# Altium PCB 20K Control Board V1.1.PcbDoc (part 10 of 24)
Units mm, origin at the board's own origin, x right, y up, seen from the top; angles counter-clockwise.
Board outline 132 x 260 mm, 4 copper layers (Top Layer, GND, VCC, Bottom Layer); 1384 components, 779 nets, 4515 pads, 1774 vias.
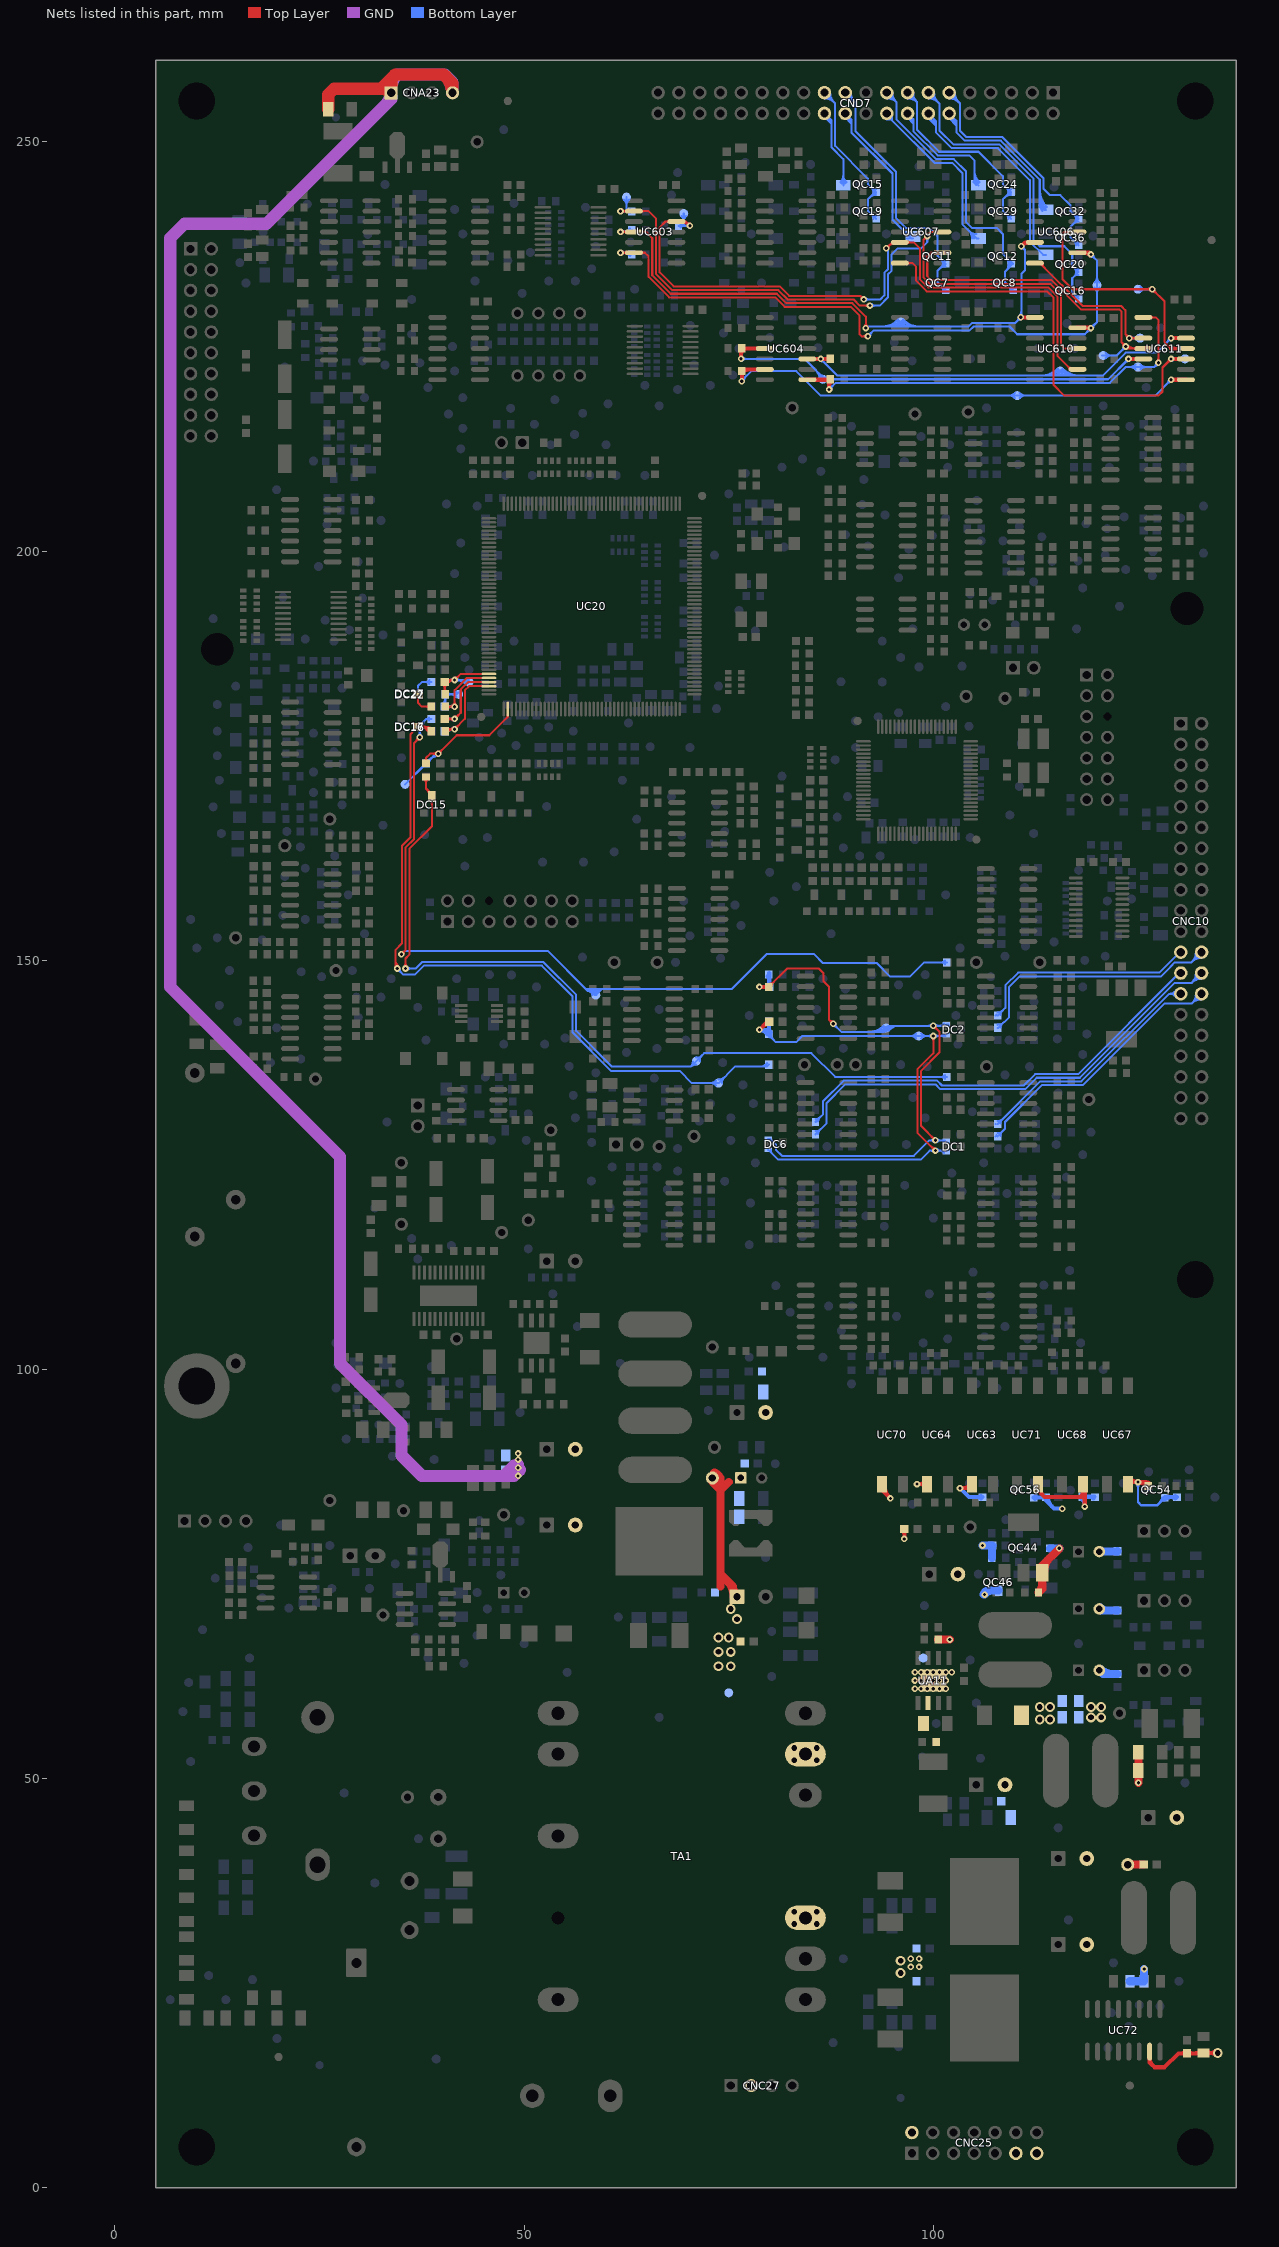
[diagram p12: the nets of this part, all layers, seen from the top]

## Via types
v1: diameter 0.8, hole 0.4, Top Layer to Bottom Layer, tented both sides, 1354 vias
v2: diameter 1.2, hole 0.7, Top Layer to Bottom Layer, 261 vias
v3: diameter 0.8, hole 0.4, Top Layer to Bottom Layer, 58 vias
v4: diameter 1.2, hole 0.7, Top Layer to Bottom Layer, tented top, 58 vias
v5: diameter 0.8, hole 0.4, Top Layer to Bottom Layer, tented top, 22 vias
v6: diameter 1.2, hole 0.7, Top Layer to Bottom Layer, tented both sides, 13 vias
v7: diameter 1.2, hole 0.7, Top Layer to Bottom Layer, tented bottom, 8 vias

## Nets (pads, with @x,y where several pads share a name; then routed paths per layer and width w, separated by ;. In a path a pad name is that pad's centre, name@x,y a point inside that pad or via, vN(x,y) a via of type N, cw(c..) or ccw(c..) an arc to the next point about the centre after c; other vN are vias at no path point) (continued)
GND-DRV: CA3.1 CA4.2 CA7.1 CA71.2 CA72.2 CA73.1 CA76.2 CA81.1 CA82.1 CA84.2 CNA23.1 CNA23.4 GND-DRV.1 LA5.1 LA17.1 pad.ICT@75,60.5 RA112.2 RA119.1 RA120.1 TA1.15 | length 289.2
  Top Layer w1: GND-DRV.1@72.905,86.465 cw(c72.4,84.947) 74,84.947 ; GND-DRV.1@73,86.25 74,85.25 ; GND-DRV.1@73.221,87.414 cw(c72.862,86.334) 74,86.334 ; GND-DRV.1@73.299,86.726 ccw(c74.85,86.601) 73.75,85.5 ; 74,73.5 74,75 ; 74,86.75 74,85.25 ; 74.787,74.213 cw(c72.824,72.25) CA81.1@75.6,72.25 ; 75,86.25 74,85.25 ; 75.125,73.875 cw(c73.891,72.641) CA81.1@75.607,72.323 ; 75.5,73.5 74,75 ; 74,75 74,85.25
  Top Layer w1.5: CA7.1@26.05,254 26.05,255.8 26.75,256.5 33.25,256.5 CNA23.1@33.75,256 33.75,257.75 34.25,258.25 ; 32.422,256.5 cw(c32.422,254.672) CNA23.1@33.715,255.965 ; 32.5,256.5 34.25,258.25 ; CNA23.1@33.796,256.019 cw(c35.708,256.792) 34.25,258.25 ; 40.345,258.064 cw(c38.281,256) CNA23.4@41.2,256 ; CNA23.4@41.25,256 41.25,257.159 40.159,258.25 34.25,258.25
  GND w1.5: 33.134,254.634 ccw(c31.769,256) CNA23.1@33.7,256 ; CNA23.1@33.799,256.009 cw(c36.29,256.46) 34.5,258.25 ; 40.281,258.219 cw(c38.062,256) CNA23.4@41.2,256 ; CNA23.4@41.25,256 41.25,257.25 40.25,258.25 34.5,258.25 ; 47.681,87 ccw(c47.681,89.569) v1@49.497,87.753 ; 48.75,87 47.5,87 ; 48.75,88.25 47.5,87 ; 34.5,258.25 33.75,257.5 33.75,255.25 18.5,240 8.5,240 6.75,238.25 6.75,146.75 27.5,126 27.5,100.75 35,93.25 35,89.5 37.5,87 47.5,87 ; 48.567,88.067 cw(c49.25,87.384) 49.25,88.35 ccw(c49.25,87.384) 48.567,88.067
  other v1: 49.25,87 49.25,88 49.25,89 49.25,89.75
  other v2: 83,52.25 85.75,52.25 83,53.75 85.75,53.75
  other v7: 73.75,63.75 75.25,63.75 73.75,65.5 75.25,65.5 73.75,67.25 75,67.25 76,69.5 75.25,70.75
GND_FAN: CC29.1 CC50.2 CC51.1 CC74.1 CC81.2 CC194.1 CC197.2 LA13.2 LA19.2 QC44.3 QC46.3 RC80.1 RC86.1 RC89.1 | length 26.3
  Top Layer w1: RC80.1@112.85,72.75 113.3,73.2 QC44.3@113.3,75.15 113.3,76.054 v1(115.396,78.15) ; RC80.1@112.885,72.765 ccw(c111.884,73.766) 113.3,73.766 ; QC44.3@113.55,75.475 cw(c115.552,75.475) 114.136,76.891
  Bottom Layer w1: v1(106,78.5) CC29.1@107.2,78.5 ; v1@106.152,72.522 cw(c106.75,72.388) 106.75,73 ; v1@106.179,72.571 cw(c107.216,71.534) 107.216,73 ; v1(106.25,72.5) 106.75,73 ; RC89.1@107.15,77 CC29.1@107.15,78.45 ; QC46.3@107.965,73 106.75,73 ; RC86.1@114.25,78.15 v1(115.396,78.15) ; CC50.2@120.27,63.25 120.72,62.8 CC74.1@122.5,62.8 ; CC81.2@120.27,70.75 120.47,70.55 CC51.1@122.5,70.55 ; CC197.2@120.27,77.75 122.45,77.75 CC194.1@122.5,77.8 ; CC50.2@120.411,63.391 ccw(c121.839,64.819) 121.839,62.8 ; CC81.2@120.411,70.891 ccw(c121.236,71.716) 121.236,70.55
  other v6: 119.25,57.5 120.5,57.5 119.25,58.75 120.5,58.75
GND_S: CA1.1 CA2.2 CA92.2 CA93.1 CA94.1 CA96.2 CA98.2 CA100.2 CA101.2 CA102.1 CA103.2 CC251.1 CC402.2 CC411.1 CC412.2 CC415.2 CNC25.2 CNC25.11 CNC25.13 CNC27.2 DA12.1 GND_COM.1 LA13.1 LA19.1 pad.ICT@98.75,64.75 QC54.2 QC56.2 RA129.2 RA132.2 RA137.1 RA138.1 RA140.1 RC623.1 RC627.1 RC630.1 RC641.1 RC651.1 TA1.11 UA11.6 UA11.9 UC63.3 UC64.3 UC67.2 UC68.2 UC70.3 UC71.2 UC72.15 | length 88.3
  Top Layer w0.5: UC70.3@93.73,86 93.73,85.27 v1(94.75,84.25) ; UC70.3@94.08,85.6 ccw(c95.722,85.6) v1@94.561,84.439 ; CA102.1@96.273,80.323 cw(c95.846,79.896) 96.45,79.896 cw(c97.054,79.896) CA102.1@96.627,80.323 ; v3(96.45,79.3) CA102.1@96.45,80.5 ; v1(98,86) UC64.3@99.23,86 ; UC64.3@98.983,85.753 ccw(c98.385,85.155) 98.385,86 ccw(c98.385,86.845) UC64.3@98.983,86.247 ; v1(103.25,85.5) UC63.3@104.73,85.5 ; v1@103.644,85.5 ccw(c103.644,86.686) UC63.3@104.483,85.847 ; 104.126,85.5 cw(c104.126,84.996) UC63.3@104.483,85.353 ; UC71.2@112.77,86 112.77,85.23 113.6,84.4 117.75,84.4 ; UC71.2@113.115,85.539 ccw(c114.18,85.35) 113.415,84.585 ; 118.25,84.707 cw(c119.163,84.707) UC68.2@118.517,85.353 ; 118.25,84.75 117.9,84.4 117.75,84.4 ; 118.25,84.803 ccw(c117.473,84.803) 118.023,85.353 cw(c116.87,84.2) 118.5,84.2 ; UC68.2@118.25,86 118.25,84.4 ; v1(118.5,83.25) UC68.2@118.5,85.75 ; 118.5,84.15 118.25,84.4 ; UC67.2@123.67,86.25 125.75,86.25 RC623.1@126.25,85.75 ; UC67.2@124.017,86.647 ccw(c124.977,87.607) v1@124.977,86.25 ; v1@124.681,86.25 cw(c124.681,84.231) RC623.1@126.109,85.659 ; RC623.1@125.823,86.177 ccw(c126.25,86.604) RC623.1@126.25,86 ; RC623.1@125.888,86.25 cw(c125.888,85.438) RC623.1@126.462,86.012 ; UC72.15@126.425,16.65 126.425,15.325 127,14.75 128.25,14.75 129.95,16.45 CC411.1@131,16.45 CC251.1@132.95,16.45 ; UC72.15@126.474,15.842 ccw(c127.406,15.681) 126.737,15.013 ; CC411.1@130.823,16.273 ccw(c130.396,15.846) 130.396,16.45 ccw(c130.396,17.054) CC411.1@130.823,16.627 ; CC411.1@131.177,16.273 cw(c131.604,15.846) 131.604,16.45 cw(c131.604,17.054) CC411.1@131.177,16.627 ; 131.955,16.45 ccw(c131.955,17.345) CC251.1@132.588,16.712 ; 132.196,16.45 cw(c132.196,15.896) CC251.1@132.588,16.288 ; CC251.1@133,16.5 v6(134.75,16.5) ; CC251.1@133.412,16.288 cw(c133.924,15.776) 133.924,16.5 cw(c133.924,17.224) CC251.1@133.412,16.712 ; v6@134.503,16.253 ccw(c133.905,15.655) 133.905,16.5 ccw(c133.905,17.345) v6@134.503,16.747 ; 117.75,84.4 118.25,84.4
  Top Layer w1: RA140.1@100.6,67 v3(102,67) ; GND_COM.1@123.75,39.5 CA93.1@125.7,39.5 ; v1(125.05,49.5) RA132.2@125.05,51 RA129.2@125.05,53.25
  Bottom Layer w0.3: v1@124.823,86.073 cw(c124.396,85.646) 125,85.646 cw(c125.604,85.646) v1@125.177,86.073 ; v1(125,86.25) 125,83.8 125.4,83.4 127.305,83.4 QC54.2@128.25,84.345 ; QC54.2@127.943,84.345 cw(c127.201,84.345) 127.726,83.821 cw(c128.25,83.296) QC54.2@128.25,84.038
  Bottom Layer w0.5: v1(103.25,85.5) 104.35,84.4 RC641.1@106,84.4 ; RC641.1@105.809,84.259 ccw(c105.467,83.917) 105.467,84.4 ccw(c105.467,84.883) RC641.1@105.809,84.541 ; QC56.2@112.25,84.345 RC651.1@113.695,84.345 ; QC56.2@112.397,84.198 cw(c112.75,83.845) 112.75,84.345 cw(c112.75,84.845) QC56.2@112.397,84.492 ; 113.084,84.345 ccw(c113.084,85.016) RC651.1@113.559,84.541 ; RC651.1@113.75,84.4 113.75,84 114.75,83 v1(115.75,83) ; RC651.1@114,84.4 ccw(c115.569,84.4) 114.46,83.29 ; CC402.2@118.073,84.273 cw(c117.043,83.243) v1@118.5,83.243 ; CC402.2@118.25,84.45 RC627.1@119.7,84.45 ; CC402.2@118.427,84.273 cw(c118.854,83.846) 118.854,84.45 cw(c118.854,85.054) CC402.2@118.427,84.627 ; v1(118.5,83.25) CC402.2@118.5,84.2 ; 119.096,84.45 cw(c119.096,83.796) RC627.1@119.559,84.259 ; QC54.2@128.305,84.4 RC630.1@129.75,84.4 ; 129.217,84.4 cw(c129.217,83.917) 129.559,84.259 ccw(c129.217,83.917) 129.217,84.4 ; 129.217,84.4 ccw(c129.217,84.883) 129.559,84.541 cw(c129.217,84.883) 129.217,84.4 ; QC54.2@128.397,84.198 cw(c128.883,83.712) 128.883,84.4 ccw(c128.883,83.712) QC54.2@128.397,84.198
  Bottom Layer w1: CC415.2@124,25.25 CC412.2@125.75,25.25 v1(125.75,26.75)
  other v2: 96,26.25 96,27.75 83,32.25 85.75,32.25 83,33.75 85.75,33.75
  other v3: 97.25,27 98.25,27 97.25,28 98.25,28
  other v5: 97.75,61 98.5,61 99.25,61 100,61 100.75,61 101.5,61 97.75,62 98.5,62 99.25,62 100,62 100.75,62 101.5,62 97.75,63 98.5,63 99.25,63 100,63 100.75,63 101.5,63 102.25,63
  other v6: 113,57.25 114.25,57.25 113,58.75 114.25,58.75
ICHOKE1: DC22.3 RC263.1 | length 5.4
  Bottom Layer w0.254: DC22.3@36.799,182.699 ccw(c36.235,183.262) 37.032,183.262 ccw(c37.829,183.262) DC22.3@37.265,182.699 ; DC22.3@37.032,182.465 37.032,183.532 37.5,184 RC263.1@38.65,184 ; RC263.1@38.422,183.772 ccw(c37.87,183.22) 37.87,184 ccw(c37.87,184.78) RC263.1@38.422,184.228
ICHOKE1.AD: CC154.2 pad.ICT@43.25,184 RC234.2 RC263.2 UC20.39 | length 22.6
  Top Layer w0.25: CC154.2@40.035,183.735 cw(c39.395,183.095) 40.3,183.095 cw(c41.205,183.095) CC154.2@40.565,183.735 ; RC234.2@40.12,182.78 ccw(c39.686,183.214) 40.3,183.214 ; 40.3,183.455 ccw(c41.255,183.455) RC234.2@40.58,182.78 ; CC154.2@40.3,184 40.3,182.55 RC234.2@40.35,182.5 ; CC154.2@40.402,183.928 cw(c41.02,183.496) 41.02,184.25 ; CC154.2@40.55,184.25 v1(41.5,184.25) ; CC154.2@40.607,183.785 cw(c41.5,183.161) v1(41.5,184.25) ; v1@41.306,184.056 ccw(c40.836,183.586) 40.836,184.25 ccw(c40.836,184.914) v1@41.306,184.444 ; v1@41.5,184.525 ccw(c41.5,185.189) 41.969,184.719 ccw(c42.439,184.25) v1@41.775,184.25 ; UC20.39@45.7,185 42.25,185 v1(41.5,184.25)
  Bottom Layer w0.25: RC263.2@40.35,184.25 v1(41.5,184.25) ; RC263.2@40.407,184.001 cw(c40.952,183.528) 40.952,184.25 ; RC263.2@40.596,183.837 cw(c41.5,183.053) v1(41.5,184.25) ; v1@41.306,184.056 ccw(c40.836,183.586) 40.836,184.25 ccw(c40.836,184.914) v1@41.306,184.444 ; v1@41.62,184.25 cw(c41.62,182.37) pad.ICT@42.949,183.699 ; v1@41.694,184.056 cw(c42.164,183.586) 42.164,184.25 cw(c42.164,184.914) v1@41.694,184.444 ; 42.224,184.25 cw(c42.224,182.974) pad.ICT@43.126,183.876 ; pad.ICT@43.25,184.25 v1(41.5,184.25)
ICHOKE2: DC27.3 RC273.1 | length 5.4
  Top Layer w0.254: DC27.3@36.799,182.301 cw(c36.235,181.738) 37.032,181.738 cw(c37.829,181.738) DC27.3@37.265,182.301 ; DC27.3@37.032,182.535 37.032,181.468 37.5,181 RC273.1@38.65,181 ; RC273.1@38.422,180.772 ccw(c37.87,180.22) 37.87,181 ccw(c37.87,181.78) RC273.1@38.422,181.228
ICHOKE2.AD: CC165.2 pad.ICT@42,182.5 RC235.2 RC273.2 UC20.40 | length 23.7
  Top Layer w0.25: RC273.2@40.35,181 v1(41.5,181) ; RC273.2@40.58,180.77 cw(c41.135,180.215) 41.135,181 cw(c41.135,181.785) RC273.2@40.58,181.23 ; v1@41.306,180.806 ccw(c40.836,180.336) 40.836,181 ccw(c40.836,181.664) 41.306,181.194 ccw(c40.836,181.664) 41.5,181.664 ccw(c42.164,181.664) v1@41.694,181.194 ; v1@41.55,181.05 v1(41.5,181) ; UC20.40@45.7,184.5 43,184.5 41.5,183 v1(41.5,181)
  Bottom Layer w0.25: CC165.2@40.035,181.265 ccw(c39.274,182.026) RC235.2@40.35,182.026 ; RC235.2@40.12,182.22 cw(c39.565,181.665) 40.35,181.665 cw(c41.135,181.665) RC235.2@40.58,182.22 ; CC165.2@40.3,181 v1(41.5,181) ; CC165.2@40.35,181.05 RC235.2@40.35,182.5 41.75,182.5 pad.ICT@42,182.75 ; 40.35,181.785 ccw(c41.085,181.785) 40.565,181.265 ccw(c41.205,181.905) 41.205,181 ccw(c41.205,180.095) CC165.2@40.565,180.735 ; RC235.2@40.58,182.27 cw(c41.135,181.715) 41.135,182.5 cw(c41.135,183.285) RC235.2@40.58,182.73 ; v1@41.306,180.806 ccw(c40.836,180.336) 40.836,181 ccw(c40.836,181.664) v1@41.306,181.194 ; pad.ICT@41.699,182.199 ccw(c40.974,181.474) 40.974,182.5 ccw(c40.974,183.526) pad.ICT@41.699,182.801
IGRIDMAX: CC64.2 DC1.2 DC2.2 DC6.2 pad.ICT@94.225,141.725 RC114.2 RC133.2 | length 96.4
  Top Layer w0.25: RC114.2@79.9,146.75 82.15,149 86,149 86.575,148.425 86.575,147.425 87.25,146.75 87.25,142.75 v1(87.75,142.25) ; RC114.2@79.9,147.125 ccw(c79.9,148.03) 80.54,147.39 ; RC114.2@80.225,146.8 cw(c80.889,146.8) 80.419,147.269 ; v1@87.475,142.25 ccw(c86.811,142.25) 87.281,142.719 ccw(c87.75,143.189) v1@87.75,142.525 ; v1@99.975,128 ccw(c99.311,128) 99.781,128.469 ccw(c100.25,128.939) v1@100.25,128.275 ; v1@100,141.725 cw(c100,141.061) 100.469,141.531 cw(c100.939,142) v1@100.275,142 ; v1(100,142) 100.75,141.25 100.75,138.75 98.5,136.5 98.5,129.75 v1(100.25,128)
  Top Layer w0.5: v1(78.75,146.75) RC114.2@79.9,146.75 ; RC114.2@79.759,146.609 ccw(c79.417,146.267) 79.417,146.75 ccw(c79.417,147.233) RC114.2@79.759,146.891
  Bottom Layer w0.25: DC6.2@79.823,128.15 80.1,128.15 80.75,127.5 80.75,126.85 81.5,126.1 97.6,126.1 99.5,128 v1(100.25,128) DC1.2@101.423,128 ; DC6.2@79.973,127.975 cw(c79.973,127.246) 80.489,127.761 ; v1@87.75,141.975 cw(c87.75,141.311) 88.219,141.781 cw(c88.689,142.25) v1@88.025,142.25 ; v1(87.75,142.25) 88.75,141.25 93.75,141.25 94.5,142 v1(100,142) 101.423,142 DC2.2@101.573,142.15 DC2.2@101.85,142.15 ; 92.052,141.25 ccw(c92.052,143.899) pad.ICT@93.925,142.026 ; 92.655,141.25 ccw(c92.655,143.295) pad.ICT@94.102,141.849 ; 93.259,141.25 ccw(c93.259,142.692) pad.ICT@94.278,141.672 ; 93.862,141.25 ccw(c93.862,142.088) pad.ICT@94.455,141.496 ; pad.ICT@94.172,141.778 cw(c94.707,141.243) 94.707,142 ; pad.ICT@94.349,141.602 cw(c95.311,140.64) 95.311,142 ; pad.ICT@94.526,141.425 cw(c95.914,140.036) 95.914,142 ; v1@99.806,141.806 ccw(c99.336,141.336) 99.336,142 ccw(c99.336,142.664) v1@99.806,142.194 ; v1@100.056,127.806 ccw(c99.586,127.336) 99.586,128 ccw(c99.586,128.664) v1@100.056,128.194 ; v1@100.194,141.806 cw(c100.664,141.336) 100.664,142 cw(c100.664,142.664) v1@100.194,142.194 ; v1@100.444,127.806 cw(c100.914,127.336) 100.914,128 cw(c100.914,128.664) v1@100.444,128.194 ; 100.638,142 ccw(c100.638,142.935) DC2.2@101.299,142.274 ; 100.759,128 cw(c100.759,127.236) DC1.2@101.299,127.776
  Bottom Layer w0.5: v1(78.75,146.75) CC64.2@79.95,146.75 RC133.2@79.95,148.45 ; RC133.2@79.759,148.059 cw(c79.296,147.596) 79.95,147.596 ; CC64.2@79.773,146.573 ccw(c79.346,146.146) 79.346,146.75 ccw(c79.346,147.354) 79.773,146.927 ccw(c79.346,147.354) 79.95,147.354 ccw(c80.554,147.354) CC64.2@80.127,146.927
IGRIDMIN: CC71.1 DC1.1 DC2.1 DC6.1 pad.ICT@98.2,140.75 RC144.1 RC147.2 | length 81.9
  Top Layer w0.25: v1@99.806,140.556 cw(c99.336,140.086) 100,140.086 cw(c100.664,140.086) v1@100.194,140.556 ; v1@99.975,126.75 ccw(c99.311,126.75) 99.781,127.219 ccw(c100.25,127.689) v1@100.25,127.025 ; v1(100,140.75) 100,138.636 98.05,136.686 98.05,128.95 v1(100.25,126.75)
  Top Layer w0.5: v1(78.75,141.5) 79.75,142.5 CC71.1@79.95,142.5 ; 79.182,141.932 cw(c79.95,141.164) CC71.1@79.95,142.25
  Bottom Layer w0.25: DC6.1@79.823,126.85 81.023,125.65 98.45,125.65 99.55,126.75 v1(100.25,126.75) DC1.1@101.473,126.75 ; RC147.2@79.9,140.625 cw(c79.9,140.082) 80.284,140.466 ; RC147.2@79.9,141.25 79.9,140.85 80.75,140 83.25,140 84,140.75 97.25,140.75 ; DC6.1@80.148,126.85 ccw(c80.933,126.85) 80.378,126.295 ; RC147.2@80.225,140.95 ccw(c81.251,140.95) 80.526,140.224 ; pad.ICT@97.883,140.467 ccw(c97.25,139.9) 97.25,140.75 ; pad.ICT@97.883,141.033 cw(c97.25,141.6) 97.25,140.75 ; pad.ICT@98.501,140.449 cw(c99.226,139.724) 99.226,140.75 cw(c99.226,141.776) pad.ICT@98.501,141.051 ; v1@99.806,140.556 ccw(c99.336,140.086) 99.336,140.75 ccw(c99.336,141.414) v1@99.806,140.944 ; v1@100.056,126.556 ccw(c99.586,126.086) 99.586,126.75 ccw(c99.586,127.414) v1@100.056,126.944 ; v1@100.194,140.556 cw(c100.664,140.086) 100.664,140.75 cw(c100.664,141.414) v1@100.194,140.944 ; v1@100.444,126.556 cw(c100.914,126.086) 100.914,126.75 cw(c100.914,127.414) v1@100.444,126.944 ; v1@100.638,126.75 cw(c100.638,125.815) DC1.1@101.299,126.476 ; 100.759,140.75 ccw(c100.759,141.514) DC2.1@101.299,140.974 ; DC2.1@101.473,140.75 v1(100,140.75) pad.ICT@98.2,140.75 97.25,140.75
  Bottom Layer w0.5: v1(78.75,141.5) RC147.2@79.9,141.5 ; v1(78.75,141.5) cw(c78.75,140.358) RC147.2@79.729,140.947 ; RC147.2@79.635,141.5 cw(c79.635,140.89) RC147.2@80.157,141.205 ; RC147.2@79.759,141.191 ccw(c79.417,141.533) 79.9,141.533 ccw(c80.383,141.533) RC147.2@80.041,141.191 ; RC144.1@79.759,142.309 cw(c79.417,141.967) 79.9,141.967 cw(c80.383,141.967) RC144.1@80.041,142.309 ; RC147.2@79.9,141 RC144.1@79.9,142.5
IGRIDR: DC16.3 pad.ICT@58.75,145.75 RC18.1 RC228.1 | length 120.2
  Top Layer w0.25: v1(35,150.75) 35.525,151.275 35.525,163.798 36.55,164.823 36.55,176.55 v1(37.25,177.25) ; v1@35,151.025 ccw(c35,151.689) 35.469,151.219 ccw(c35.939,150.75) v1@35.275,150.75 ; v1@36.975,177.25 cw(c36.311,177.25) 36.781,176.781 cw(c37.25,176.311) v1@37.25,176.975
  Bottom Layer w0.25: v1(35,150.75) 35.4,151.15 52.896,151.15 57.546,146.5 ; DC16.3@36.975,178.23 cw(c36.311,177.566) v1@37.25,177.566 ; v1@37.056,177.444 ccw(c36.586,177.914) 37.25,177.914 ccw(c37.914,177.914) v1@37.444,177.444 ; DC16.3@37.21,178.797 ccw(c37.21,179.17) DC16.3@37.473,178.907 ; v1(37.25,177.25) 37.25,178.247 DC16.3@37.032,178.465 38.067,179.5 ; 37.25,177.76 cw(c37.915,177.76) DC16.3@37.445,178.23 ; DC16.3@37.292,178.465 cw(c37.92,178.465) DC16.3@37.476,178.909 ; DC16.3@37.542,178.465 cw(c38.773,178.465) 37.903,179.336 ; RC228.1@38.374,179.329 ccw(c38.067,179.139) 38.067,179.5 ; RC228.1@38.374,179.671 cw(c38.067,179.861) 38.067,179.5 ; RC228.1@38.65,179.5 38.067,179.5 ; 58.054,146.25 cw(c58.054,145.728) pad.ICT@58.575,145.745 ; 58.25,146.25 pad.ICT@58.75,145.75 ; 58.311,146.25 cw(c58.311,145.736) pad.ICT@58.825,145.752 ; pad.ICT@58.325,145.737 ccw(c57.796,145.72) 57.796,146.25 ; pad.ICT@58.532,146.115 ccw(c58.301,146.5) 58.75,146.5 ; pad.ICT@58.968,146.115 cw(c59.199,146.5) 58.75,146.5 ; 59.5,146.5 59.25,146.25 ; 99.5,149.75 100.75,149.75 ; RC18.1@101.42,149.52 ccw(c100.865,148.965) 100.865,149.75 ccw(c100.865,150.535) RC18.1@101.42,149.98 ; RC18.1@101.65,149.75 100.75,149.75 ; 57.546,146.5 57.796,146.25 ; 57.546,146.5 75.364,146.5 79.614,150.75 85.432,150.75 86.507,149.675 93.075,149.675 94.75,148 97.136,148 98.886,149.75 100.75,149.75 ; 57.796,146.25 59.25,146.25 ; pad.ICT@58.75,145.75 59.25,146.25 ; pad.ICT@58.75,145.75 58.75,146.5
IGRIDR+: CNC10.23 RC24.2 | length 28.7
  Bottom Layer w0.25: RC24.2@107.6,143.25 RC24.2@107.725,143.375 ; RC24.2@107.85,143.25 108.8,144.2 108.8,146.936 110.364,148.5 127.614,148.5 130.104,150.99 CNC10.23@130.23,150.99 CNC10.23@130.23,150.932 ; RC24.2@107.85,143.625 ccw(c107.85,144.53) 108.49,143.89 ; RC24.2@108.175,143.3 cw(c108.839,143.3) 108.369,143.769
IGRIDR-: CNC10.24 RC42.2 | length 38.2
  Bottom Layer w0.25: RC42.2@107.85,141.75 107.937,141.75 109.25,143.063 109.25,146.75 ; RC42.2@107.85,142.125 ccw(c107.85,143.24) 108.638,142.452 ; RC42.2@108.175,141.8 cw(c108.629,141.8) 108.308,142.121 ; 109.25,145 109.25,146.75 ; 129,149.222 127.827,148.05 110.55,148.05 109.25,146.75 ; 129,149.25 129.5,149.75 131.53,149.75 CNC10.24@132.77,150.99 ; CNC10.24@132.07,150.99 cw(c130.38,150.99) 131.575,149.795 cw(c132.77,148.6) CNC10.24@132.77,150.29 ; CNC10.24@132.32,150.99 cw(c131.234,150.99) 132.002,150.222 cw(c132.77,149.454) CNC10.24@132.77,150.54
IGRIDR.AD: CC143.2 RC228.2 UC20.41 | length 15.9
  Top Layer w0.25: CC143.2@40.3,179.5 v1(41.5,179.5) 42.25,180.25 42.25,183.114 43.136,184 UC20.41@45.7,184 ; CC143.2@40.565,179.235 cw(c41.205,178.595) 41.205,179.5 cw(c41.205,180.405) CC143.2@40.565,179.765 ; v1@41.306,179.306 ccw(c40.836,178.836) 40.836,179.5 ccw(c40.836,180.164) v1@41.306,179.694 ; v1@41.5,179.775 ccw(c41.5,180.439) 41.969,179.969 ccw(c42.439,179.5) v1@41.775,179.5
  Bottom Layer w0.25: RC228.2@40.35,179.5 v1(41.5,179.5) ; RC228.2@40.58,179.27 cw(c41.135,178.715) 41.135,179.5 cw(c41.135,180.285) RC228.2@40.58,179.73 ; v1@41.306,179.306 ccw(c40.836,178.836) 40.836,179.5 ccw(c40.836,180.164) v1@41.306,179.694
IGRIDS: DC17.3 pad.ICT@73.75,135 RC91.1 RC229.1 | length 103.9
  Top Layer w0.25: 34.25,149.664 ccw(c35.164,149.664) v1@34.518,149.018 ; 34.25,150.267 ccw(c35.767,150.267) v1@34.694,149.194 ; v1(34.5,149) 34.25,149.25 34.25,151.25 35.075,152.075 35.075,163.984 36.1,165.009 36.1,177.603 DC17.3@37.032,178.535 ; 36.189,177.692 ccw(c35.384,178.497) DC17.3@36.522,178.526 ; DC17.3@36.591,178.093 cw(c36.854,177.83) DC17.3@36.854,178.203 ; DC17.3@36.601,178.103 ccw(c36.187,178.518) DC17.3@36.772,178.533 ; DC17.3@37.445,178.3 cw(c38.012,177.733) 38.012,178.535 cw(c38.012,179.337) DC17.3@37.445,178.77 ; DC17.3@37.532,178.535 cw(c37.532,177.213) RC229.1@38.59,178.005 ; 38.031,178.535 cw(c38.031,177.587) RC229.1@38.79,178.155 ; RC229.1@38.325,178.055 ccw(c37.694,178.063) 38.14,178.51 ccw(c38.499,178.869) RC229.1@38.591,178.37 ; RC229.1@38.39,177.855 ccw(c37.032,176.839) DC17.3@37.032,178.535 ; RC229.1@38.65,178 38.115,178.535 DC17.3@37.032,178.535
  Bottom Layer w0.25: v1@34.5,148.725 cw(c34.5,148.122) 34.926,148.548 ; v1(34.5,149) 34.5,148.975 35.225,148.25 36.636,148.25 37.736,149.35 52.15,149.35 55.9,145.6 55.9,141.191 60.591,136.5 69,136.5 70.5,135 pad.ICT@73.75,135 75.75,137 79.65,137 RC91.1@79.9,137.25 ; v1@34.775,149 ccw(c35.5,149) 34.987,148.487 ; pad.ICT@73.449,134.699 ccw(c72.724,133.974) 72.724,135 ccw(c72.724,136.026) pad.ICT@73.449,135.301 ; pad.ICT@73.75,135.425 ccw(c73.75,136.451) 74.476,135.726 ccw(c75.201,135) pad.ICT@74.175,135 ; 78.633,137 ccw(c78.633,138.467) RC91.1@79.67,137.43 ; 79.236,137 ccw(c79.236,137.864) RC91.1@79.847,137.253
IGRIDS+: CNC10.25 RC99.2 | length 54.8
  Bottom Layer w0.25: RC99.2@85.6,130.25 86.5,131.15 86.5,132.75 89.05,135.3 100.45,135.3 101.05,134.7 111.041,134.7 112.441,136.1 117.714,136.1 130.064,148.45 CNC10.25@130.23,148.45 ; RC99.2@85.6,130.625 ccw(c85.6,131.53) 86.24,130.89 ; RC99.2@85.925,130.3 cw(c86.589,130.3) 86.119,130.769
IGRIDS-: CNC10.26 RC106.2 | length 62.9
  Bottom Layer w0.25: RC106.2@85.6,128.75 86.95,130.1 86.95,132.564 89.236,134.85 100.264,134.85 100.864,134.25 111.227,134.25 112.627,135.65 117.9,135.65 129.5,147.25 131.57,147.25 CNC10.26@132.77,148.45 ; RC106.2@85.6,129.125 ccw(c85.6,130.03) 86.24,129.39 ; RC106.2@85.925,128.8 cw(c86.589,128.8) 86.119,129.269 ; CNC10.26@132.07,148.45 cw(c130.38,148.45) 131.575,147.255 cw(c132.77,146.06) CNC10.26@132.77,147.75 ; CNC10.26@132.32,148.45 cw(c131.234,148.45) 132.002,147.682 cw(c132.77,146.914) CNC10.26@132.77,148
IGRIDS.AD: CC144.2 RC229.2 UC20.42 | length 17.4
  Top Layer w0.25: RC229.2@40.25,178.25 v1(41.5,178.25) ; RC229.2@40.407,178.001 cw(c40.952,177.528) 40.952,178.25 ; RC229.2@40.596,177.837 cw(c41.5,177.053) v1(41.5,178.25) ; v1@41.306,178.056 ccw(c40.836,177.586) 40.836,178.25 ccw(c40.836,178.914) v1@41.306,178.444 ; v1@41.5,178.525 ccw(c41.5,179.189) 41.969,178.719 ccw(c42.439,178.25) v1@41.775,178.25 ; UC20.42@45.7,183.5 43.273,183.5 42.75,182.977 42.75,179.5 v1(41.5,178.25)
  Bottom Layer w0.25: CC144.2@40.3,178.25 v1(41.5,178.25) ccw(c41.5,177.161) CC144.2@40.607,177.785 ; CC144.2@40.402,177.928 cw(c41.02,177.496) 41.02,178.25 ; v1@41.306,178.056 ccw(c40.836,177.586) 40.836,178.25 ccw(c40.836,178.914) v1@41.306,178.444
IGRIDT: DC15.3 pad.ICT@71.026,137.676 RC16.1 RC230.1 | length 121.9
  Top Layer w0.25: v1@35.306,149.194 ccw(c34.836,149.664) 35.5,149.664 ccw(c36.164,149.664) v1@35.694,149.194 ; v1(35.5,149) 35.5,150.225 35.975,150.7 35.975,163.611 38.715,166.352 DC15.3@38.715,170.032 38.715,170.285 38,171 RC230.1@38,172.4 ; RC230.1@37.77,172.17 cw(c37.215,171.615) 38,171.615 cw(c38.785,171.615) RC230.1@38.23,172.17 ; 38.095,170.905 cw(c37.4,170.21) DC15.3@38.383,170.21 ; 38.276,170.724 ccw(c38.715,171.163) DC15.3@38.715,170.542 ; DC15.3@38.48,169.619 cw(c37.913,169.052) 38.715,169.052 cw(c39.517,169.052) DC15.3@38.95,169.619
  Bottom Layer w0.25: v1(35.5,149) 36.75,149 37.55,149.8 52.336,149.8 56.35,145.786 56.35,141.377 60.727,137 70.35,137 ; v1@35.694,148.806 cw(c36.164,148.336) 36.164,149 cw(c36.164,149.664) v1@35.694,149.194 ; pad.ICT@70.601,137.654 cw(c69.741,137.609) 70.35,137 ; pad.ICT@71.004,137.251 ccw(c70.959,136.391) 70.35,137 ; pad.ICT@71.026,138.101 ccw(c71.026,139.127) 71.751,138.401 ccw(c72.477,137.676) pad.ICT@71.451,137.676 ; 98.5,135.75 88,135.75 ; RC16.1@101.42,135.52 ccw(c100.865,134.965) 100.865,135.75 ccw(c100.865,136.535) RC16.1@101.42,135.98 ; RC16.1@101.65,135.75 88,135.75 ; 70.35,137 72,138.65 85.1,138.65 88,135.75
IGRIDT+: CNC10.27 RC23.2 | length 33.6
  Bottom Layer w0.25: RC23.2@107.6,130 RC23.2@107.607,130.007 ; RC23.2@107.85,130 107.864,130 113.064,135.2 118.086,135.2 128.796,145.91 ; RC23.2@107.85,130.375 ccw(c107.85,131.313) 108.513,130.65 ; RC23.2@108.175,130.05 cw(c108.806,130.05) 108.36,130.496 ; CNC10.27@129.678,145.48 ccw(c128.796,144.792) 128.796,145.91 ; CNC10.27@129.678,146.34 cw(c128.796,147.028) 128.796,145.91 ; CNC10.27@129.875,145.633 ccw(c129.308,145.191) 129.308,145.91 ccw(c129.308,146.629) CNC10.27@129.875,146.187 ; CNC10.27@130.23,145.866 CNC10.27@130.23,145.91 128.796,145.91
IGRIDT-: CNC10.28 RC34.2 | length 38.2
  Bottom Layer w0.25: RC34.2@107.6,128.5 RC34.2@107.725,128.625 ; RC34.2@107.85,128.5 108.75,129.4 108.75,130.25 113.25,134.75 118.273,134.75 128.273,144.75 131.61,144.75 ; RC34.2@107.85,128.875 ccw(c107.85,129.78) 108.49,129.14 ; RC34.2@108.175,128.55 cw(c108.839,128.55) 108.369,129.019 ; CNC10.28@132.07,145.895 cw(c130.498,145.862) 131.61,144.75 ; CNC10.28@132.32,145.9 cw(c131.31,145.879) 132.024,145.164 cw(c132.739,144.45) CNC10.28@132.76,145.46 ; CNC10.28@132.755,145.21 ccw(c132.722,143.638) 131.61,144.75 ; CNC10.28@132.77,145.91 131.61,144.75
IGRIDT.AD: CC145.2 pad.7@35.45,171.5 RC230.2 UC20.46 | length 25.5
  Top Layer w0.25: RC230.2@37.805,174.36 ccw(c37.513,174.75) 38,174.75 ; RC230.2@38,174.1 38,174.75 ; RC230.2@38.195,174.36 cw(c38.487,174.75) 38,174.75 ; v1@39.306,175.056 ccw(c38.836,174.586) 38.836,175.25 ccw(c38.836,175.914) v1@39.306,175.444 ; v1@39.5,175.525 ccw(c39.5,176.189) 39.969,175.719 ccw(c40.439,175.25) v1@39.775,175.25 ; 47.816,179.566 ccw(c47.432,179.95) UC20.46@47.975,179.95 ; UC20.46@48,180.7 48,179.75 45.75,177.5 41.75,177.5 v1(39.5,175.25) 38.5,175.25 38,174.75
  Bottom Layer w0.25: pad.7@35.45,171.5 CC145.2@38,174.05 v1@39.2,175.25 ; CC145.2@38,174.425 ccw(c38,175.33) 38.64,174.69 ccw(c39.28,174.05) CC145.2@38.375,174.05 ; 38.518,174.568 cw(c39.5,173.587) v1@39.5,174.975 ; 38.945,174.995 cw(c39.5,174.44) v1@39.5,175.225
INVA_S1: pad.ICT@96,228 RC291.1 UC603.4 UC606.5 UC610.1 | length 99.3
  Top Layer w0.25: v1(61.77,239) UC603.4@63.4,239 64.9,239 65.65,238.25 65.65,233.691 67.891,231.45 80.868,231.45 82.018,230.3 90.086,230.3 91.75,228.636 v1(91.75,227.25) ; v1@61.964,238.806 cw(c62.434,238.336) 62.434,239 cw(c62.434,239.664) v1@61.964,239.194 ; UC603.4@62.476,238.876 ccw(c62.178,238.578) 62.178,239 ccw(c62.178,239.422) UC603.4@62.476,239.124 ; UC603.4@64.324,238.876 cw(c64.622,238.578) 64.622,239 cw(c64.622,239.422) UC603.4@64.324,239.124 ; v1@91.556,227.444 ccw(c91.086,227.914) 91.75,227.914 ccw(c92.414,227.914) v1@91.944,227.444
  Top Layer w0.5: v1(110.69,228.56) UC610.1@112.4,228.56 ; v1(110.75,237.25) 111.23,237.73 UC606.5@112.4,237.73 ; v1@110.883,237.383 cw(c111.6,236.666) UC606.5@111.6,237.68 ; 111.045,237.545 cw(c111.43,237.16) UC606.5@111.586,237.682
  Bottom Layer w0.25: v1(61.77,239) RC291.1@63.15,239 ; v1@61.883,239 ccw(c61.883,240.467) RC291.1@62.92,239.43 ; v1@61.964,238.806 cw(c62.434,238.336) 62.434,239 cw(c62.434,239.664) v1@61.964,239.194 ; 62.486,239 ccw(c62.486,239.864) RC291.1@63.097,239.253 ; v1(91.75,227.25) 91.925,227.425 104.252,227.425 104.727,227.9 110.03,227.9 v1(110.69,228.56) ; 93.586,227.425 ccw(c93.586,230.414) pad.ICT@95.699,228.301 ; 94.189,227.425 ccw(c94.189,229.811) pad.ICT@95.876,228.124 ; 94.793,227.425 ccw(c94.793,229.207) pad.ICT@96.053,227.947 ; 95.25,227.425 95.425,227.425 pad.ICT@96,228 96.575,227.425 96.75,227.425 ; 95.396,227.425 ccw(c95.396,228.604) pad.ICT@96.23,227.77 ; 95.593,227.593 ccw(c96,228) 96,227.425 ccw(c96,228) 96.407,227.593 ; pad.ICT@95.77,227.77 ccw(c96.604,228.604) 96.604,227.425 ; pad.ICT@95.947,227.947 ccw(c97.207,229.207) 97.207,227.425 ; pad.ICT@96.124,228.124 ccw(c97.811,229.811) 97.811,227.425 ; pad.ICT@96.301,228.301 ccw(c98.414,230.414) 98.414,227.425 ; v1@110.415,228.56 cw(c109.751,228.56) 110.221,228.091 cw(c110.69,227.621) v1@110.69,228.285 ; v1@110.496,228.754 ccw(c109.881,229.369) 110.75,229.369 ; v1@110.75,228.56 110.75,231.75 ; 110.75,229.079 ccw(c111.209,229.079) v1@110.884,228.754 ; 110.75,232.5 110.75,231.75 ; v1(110.75,237.25) 111.2,236.8 ; v1@110.758,236.975 cw(c110.777,236.377) 111.2,236.8 ; v1@111.025,237.242 ccw(c111.623,237.223) 111.2,236.8 ; 110.75,231.75 110.75,233.864 111.2,234.314 111.2,236.8
INVA_S2: pad.ICT@115.5,222 RC332.1 UC604.10 UC611.12 | length 67.7
  Top Layer w0.5: UC604.10@84.6,223.48 v1(86.25,223.48) RC332.1@87.38,223.48 ; 86.869,223.48 ccw(c86.869,224.031) RC332.1@87.259,223.641 ; v1(129.04,226.02) UC611.12@130.85,226.02
  Bottom Layer w0.25: v1@86.25,223.205 cw(c86.25,222.541) 86.719,223.011 cw(c87.189,223.48) v1@86.525,223.48 ; v1(86.25,223.48) 88.28,221.45 120.7,221.45 123.5,224.25 127.27,224.25 v1(129.04,226.02) ; 113.146,221.45 ccw(c113.146,224.354) pad.ICT@115.199,222.301 ; 113.75,221.45 ccw(c113.75,223.75) pad.ICT@115.376,222.124 ; 114.353,221.45 ccw(c114.353,223.147) pad.ICT@115.553,221.947 ; 114.75,221.45 114.95,221.45 pad.ICT@115.5,222 115.5,221.95 116,221.45 ; 114.957,221.45 ccw(c114.957,222.543) pad.ICT@115.73,221.77 ; 115.093,221.593 ccw(c115.44,221.94) 115.44,221.45 ; pad.ICT@115.27,221.77 ccw(c116.043,222.543) 116.043,221.45 ; pad.ICT@115.447,221.947 ccw(c116.647,223.147) 116.647,221.45 ; 115.56,221.45 ccw(c115.56,221.94) 115.907,221.593 ; pad.ICT@115.624,222.124 ccw(c117.25,223.75) 117.25,221.45 ; pad.ICT@115.801,222.301 ccw(c117.854,224.354) 117.854,221.45 ; v1@128.765,226.02 cw(c128.101,226.02) 128.571,225.551 cw(c129.04,225.081) v1@129.04,225.745
INVA_S3: pad.ICT@125,222.5 RC336.1 UC604.8 UC611.1 | length 61.4
  Top Layer w0.25: UC611.1@125.65,228.56 127.19,228.56 127.5,228.25 v1(127.5,223) ; UC611.1@126.574,228.436 cw(c126.872,228.138) 126.872,228.56 cw(c126.872,228.982) UC611.1@126.574,228.684 ; v1@127.306,223.194 ccw(c126.836,223.664) 127.5,223.664 ccw(c128.164,223.664) v1@127.694,223.194
  Top Layer w0.5: UC604.8@84.6,220.94 RC336.1@87.34,220.94 ; 86.893,220.94 ccw(c86.893,221.457) RC336.1@87.259,221.091 ; 86.941,220.94 cw(c86.941,220.491) RC336.1@87.259,220.809 ; v1(87.25,219.75) 87.25,220.85 RC336.1@87.34,220.94 ; v1@87.25,220.105 cw(c88.245,220.105) RC336.1@87.541,220.809 ; RC336.1@87.4,221 RC336.1@87.34,220.94
  Bottom Layer w0.25: v1(87.25,219.75) 88.05,220.55 121.55,220.55 123.5,222.5 127,222.5 v1(127.5,223) ; v1@87.25,220.025 ccw(c87.25,220.689) 87.719,220.219 ccw(c88.189,219.75) v1@87.525,219.75 ; pad.ICT@124.699,222.199 ccw(c123.974,221.474) 123.974,222.5 ccw(c123.974,223.526) pad.ICT@124.699,222.801 ; pad.ICT@125.301,222.199 cw(c126.026,221.474) 126.026,222.5 cw(c126.026,223.526) pad.ICT@125.301,222.801 ; v1@127.225,223 cw(c126.561,223) 127.031,222.531 cw(c127.5,222.061) v1@127.5,222.725
INVA_S4: pad.ICT@120,232.5 RC294.1 UC603.6 UC606.9 UC610.13 | length 94.7
  Top Layer w0.25: v1(61.77,236.46) UC603.6@63.4,236.46 64.74,236.46 65.2,236 65.2,233.504 67.704,231 80.682,231 81.832,229.85 89.9,229.85 91,228.75 91,226.5 91.25,226.25 v1(92,226.25) ; v1@61.964,236.266 cw(c62.434,235.796) 62.434,236.46 cw(c62.434,237.124) v1@61.964,236.654 ; UC603.6@62.476,236.336 ccw(c62.178,236.038) 62.178,236.46 ccw(c62.178,236.882) UC603.6@62.476,236.584 ; UC603.6@64.324,236.336 cw(c64.622,236.038) 64.622,236.46 cw(c64.622,236.882) UC603.6@64.324,236.584 ; v1@91.806,226.056 ccw(c91.336,225.586) 91.336,226.25 ccw(c91.336,226.914) v1@91.806,226.444
  Top Layer w0.5: UC610.13@117.6,227.29 v1@119.21,227.29 ; UC606.9@117.6,236.46 119.04,236.46 v1(119.25,236.25) ; UC606.9@118.381,236.46 cw(c118.381,235.381) v1@119.144,236.144 ; 118.791,227.29 cw(c118.791,226.791) v1@119.144,227.144
  Bottom Layer w0.25: v1(61.77,236.46) RC294.1@63.11,236.46 ; v1@61.964,236.266 cw(c62.434,235.796) 62.434,236.46 cw(c62.434,237.124) v1@61.964,236.654 ; v1@61.979,236.46 cw(c61.979,235.129) RC294.1@62.92,236.07 ; 62.583,236.46 cw(c62.583,235.733) RC294.1@63.097,236.247 ; v1(92,226.25) 92,226.275 92.7,226.975 104.439,226.975 104.914,227.45 109.3,227.45 110.25,226.5 118.5,226.5 v1(119.25,227.25) 120,228 120,235.5 v1(119.25,236.25) ; v1@92,226.525 ccw(c92,227.128) 92.426,226.702 ; v1@92.275,226.25 cw(c93,226.25) 92.487,226.763 ; v1@118.975,227.25 cw(c118.311,227.25) 118.781,226.781 cw(c119.25,226.311) v1@119.25,226.975 ; v1@119.25,227.525 ccw(c119.25,228.189) 119.719,227.719 ccw(c120.189,227.25) v1@119.525,227.25 ; v1@119.25,235.975 cw(c119.25,235.311) 119.719,235.781 cw(c120.189,236.25) v1@119.525,236.25 ; pad.ICT@119.699,232.199 cw(c118.974,231.474) 120,231.474 cw(c121.026,231.474) pad.ICT@120.301,232.199 ; pad.ICT@119.699,232.801 ccw(c118.974,233.526) 120,233.526 ccw(c121.026,233.526) pad.ICT@120.301,232.801
INVA_SS2: pad.ICT@125,232 UC606.11 UC611.11 | length 36.1
  Top Layer w0.25: UC606.11@116.676,238.876 ccw(c116.378,238.578) 116.378,239 ccw(c116.378,239.422) UC606.11@116.676,239.124 ; UC606.11@117.6,239 116,239 115.75,238.75 115.75,234.75 115.75,233.25 117,232 v1(126.75,232) 128.25,230.5 128.25,225.54 129.04,224.75 ; v1@126.556,231.806 ccw(c126.086,231.336) 126.086,232 ccw(c126.086,232.664) v1@126.556,232.194 ; v1@126.75,231.725 cw(c126.75,231.061) 127.219,231.531 cw(c127.689,232) v1@127.025,232
  Top Layer w0.5: 129.04,224.75 UC611.11@130.85,224.75
  Bottom Layer w0.25: pad.ICT@125,232 v1(126.75,232) ; pad.ICT@125.301,231.699 cw(c126.026,230.974) 126.026,232 cw(c126.026,233.026) pad.ICT@125.301,232.301 ; v1@126.556,231.806 ccw(c126.086,231.336) 126.086,232 ccw(c126.086,232.664) v1@126.556,232.194
INVA_SS3: pad.ICT@125.25,226.02 UC606.7 UC611.3 | length 26.2
  Top Layer w0.25: UC606.7@112.4,235.19 112.992,235.19 118.232,229.95 122.936,229.95 123.45,229.436 123.45,226.5 v1(123.93,226.02) UC611.3@125.65,226.02 ; UC606.7@113.375,235.19 ccw(c114.3,235.19) 113.646,234.536 ; v1@123.655,226.02 ccw(c122.991,226.02) 123.461,226.489 ccw(c123.93,226.959) v1@123.93,226.295 ; v1@124.124,225.826 cw(c124.594,225.356) 124.594,226.02 cw(c124.594,226.684) v1@124.124,226.214 ; UC611.3@124.726,225.896 ccw(c124.428,225.598) 124.428,226.02 ccw(c124.428,226.442) UC611.3@124.726,226.144
  Bottom Layer w0.25: v1(123.93,226.02) pad.ICT@125.25,226.02 ; v1@124.124,225.826 cw(c124.594,225.356) 124.594,226.02 cw(c124.594,226.684) v1@124.124,226.214 ; pad.ICT@124.949,225.719 ccw(c124.224,224.994) 124.224,226.02 ccw(c124.224,227.046) pad.ICT@124.949,226.321
INVAQ1_A: CND7.17 QC8.2 QC12.2 | length 43.2
  Bottom Layer w0.25: CND7.17@94.31,256.02 95.5,254.83 ; CND7.17@94.312,255.32 cw(c94.317,253.647) 95.5,254.83 ; CND7.17@94.311,255.57 cw(c94.315,254.495) 95.075,255.255 cw(c95.835,256.015) CND7.17@94.76,256.019 ; CND7.17@95.01,256.018 ccw(c96.683,256.013) 95.5,254.83 ; 108.756,236.089 cw(c107.762,235.095) QC12.2@109.168,235.095 ; 108.861,234.235 ccw(c108.109,234.987) QC12.2@109.169,235.069 ; 109.183,235.662 cw(c108.616,235.095) QC12.2@109.418,235.095 ; 109.244,234.618 ccw(c108.821,235.042) QC12.2@109.418,235.089 ; QC8.2@109.418,231.845 ccw(c108.616,231.845) 109.183,232.412 ccw(c109.75,232.979) QC8.2@109.75,232.177 ; QC8.2@109.75,231.845 108.75,232.845 108.75,234.124 109.721,235.095 109.75,235.095 108.5,236.345 108.5,238.75 107.75,239.5 104.702,239.5 104,240.202 104,246.386 102.486,247.9 100.327,247.9 95.5,252.727 95.5,254.83
INVAQ1_K: CND7.18 RC356.2 | length 25.9
  Bottom Layer w0.25: CND7.18@94,253.17 94,253 94.25,252.75 94.841,252.75 94.921,252.67 ; CND7.18@94.31,253.48 94.31,253.281 94.921,252.67 ; CND7.18@94.921,253.421 94.921,252.67 ; 104.318,239.182 cw(c103.337,238.2) RC356.2@104.725,238.2 ; 104.439,239.061 ccw(c105.25,239.872) RC356.2@105.25,238.725 ; RC356.2@104.745,238.755 cw(c104.19,238.2) RC356.2@104.975,238.2 ; RC356.2@105.5,238.2 105.3,238.2 103.55,239.95 103.55,246.2 102.3,247.45 100.141,247.45 94.921,252.67
INVAQ2_A: CND7.13 QC16.2 QC20.2 | length 46.6
  Bottom Layer w0.25: CND7.13@99.39,255.32 cw(c99.39,253.63) 100.585,254.825 cw(c101.78,256.02) CND7.13@100.09,256.02 ; CND7.13@99.39,255.57 cw(c99.39,254.484) 100.158,255.252 cw(c100.926,256.02) CND7.13@99.84,256.02 ; CND7.13@99.39,256.02 100.75,254.66 100.75,251.386 102.436,249.7 108.053,249.7 112.25,245.503 112.25,238 113,237.25 116,237.25 116.966,236.284 116.966,234.879 QC20.2@117.75,234.095 117.718,234.095 116.966,233.343 116.966,231.629 QC16.2@117.75,230.845 ; 117.129,233.505 cw(c117.75,232.884) QC20.2@117.75,233.763 ; 117.205,233.582 ccw(c116.693,234.095) 117.418,234.095 ccw(c116.616,234.095) 117.183,234.662 ccw(c117.75,235.229) QC20.2@117.75,234.427 ; QC16.2@117.418,230.845 ccw(c116.616,230.845) 117.183,231.412 ccw(c117.75,231.979) QC16.2@117.75,231.177
INVAQ2_K: CND7.14 RC368.2 | length 29.3
  Bottom Layer w0.25: CND7.14@99.39,252.907 100.298,251.999 ; CND7.14@99.39,253.157 100.298,252.249 ; CND7.14@99.39,253.48 100.298,252.572 100.298,252.249 ; RC368.2@113.75,236.2 113.414,236.2 111.8,237.814 111.8,245.316 107.866,249.25 107.75,249.25 107,249.25 102.25,249.25 100.298,251.202 100.298,251.999 ; 100.298,251.999 100.298,252.249
INVAQ3_A: CND7.15 QC24.2 QC29.2 | length 32.7
  Bottom Layer w0.25: CND7.15@96.85,256.02 98,254.87 ; CND7.15@96.862,255.57 cw(c96.89,254.581) 97.589,255.281 cw(c98.289,255.98) CND7.15@97.3,256.008 ; CND7.15@96.869,255.32 cw(c96.912,253.782) 98,254.87 ; CND7.15@97.55,256.001 ccw(c99.088,255.958) 98,254.87 ; 108.668,243.168 cw(c109.5,242.337) QC24.2@109.5,243.513 ; 109.042,243.543 ccw(c108.74,243.845) 109.168,243.845 ccw(c108.366,243.845) 108.933,244.412 ccw(c109.5,244.979) QC24.2@109.5,244.177 ; QC24.2@109.095,243.595 cw(c109.5,243.19) QC24.2@109.5,243.763 ; QC29.2@109.168,240.595 ccw(c108.366,240.595) 108.933,241.162 ccw(c109.5,241.729) QC29.2@109.5,240.927 ; QC29.2@109.5,240.595 108.5,241.595 108.5,243 109.345,243.845 QC24.2@109.5,243.845 108.5,244.845 108.5,245.813 105.513,248.8 100.7,248.8 98,251.5 98,254.87
INVAQ3_K: CND7.16 RC377.2 | length 20.5
  Bottom Layer w0.25: CND7.16@96.85,252.949 97.55,252.249 ; CND7.16@96.85,253.199 97.55,252.499 ; CND7.16@96.85,253.48 97.55,252.78 97.55,252.499 ; RC377.2@104.879,245.071 ccw(c104.586,245.364) 105,245.364 ccw(c105.914,245.364) RC377.2@105.268,244.718 ; 105,245.967 ccw(c106.517,245.967) RC377.2@105.444,244.894 ; 105,246.571 ccw(c107.121,246.571) RC377.2@105.621,245.071 ; RC377.2@105.5,244.7 105,245.2 105,247.75 104.4,248.35 100.514,248.35 97.55,251.314 97.55,252.249 ; 97.55,252.249 97.55,252.499
INVAQ4_A: CND7.11 QC32.2 QC36.2 | length 37.5
  Bottom Layer w0.25: CND7.11@101.93,255.32 cw(c101.93,253.63) 103.125,254.825 cw(c104.32,256.02) CND7.11@102.63,256.02 ; CND7.11@101.93,255.57 cw(c101.93,254.484) 102.698,255.252 cw(c103.466,256.02) CND7.11@102.38,256.02 ; CND7.11@101.93,256.02 103.25,254.7 103.25,251.386 104.036,250.6 108.425,250.6 113.45,245.575 113.45,244.3 114.25,243.5 115.525,243.5 116.75,242.275 116.75,241.595 QC32.2@117.75,240.595 117.721,240.595 116.75,239.624 116.75,238.345 QC36.2@117.75,237.345 ; 117.133,240.007 cw(c117.75,239.391) QC32.2@117.75,240.263 ; 117.203,240.077 ccw(c116.686,240.595) 117.418,240.595 ccw(c116.616,240.595) 117.183,241.162 ccw(c117.75,241.729) QC32.2@117.75,240.927 ; QC36.2@117.418,237.345 ccw(c116.616,237.345) 117.183,237.912 ccw(c117.75,238.479) QC36.2@117.75,237.677
INVAQ4_K: CND7.12 RC388.2 | length 29.8
  Bottom Layer w0.25: CND7.12@101.93,252.869 102.8,251.999 ; CND7.12@101.93,253.119 102.8,252.249 ; CND7.12@101.93,253.32 102.8,252.45 102.8,252.249 ; CND7.12@101.93,253.48 102.8,252.61 102.8,252.249 ; 113,242.364 ccw(c114.164,242.364) RC388.2@113.341,241.541 ; 113,242.967 ccw(c114.767,242.967) RC388.2@113.518,241.718 ; 113,243.571 ccw(c115.371,243.571) RC388.2@113.694,241.894 ; 113,244.175 ccw(c115.975,244.175) RC388.2@113.871,242.071 ; RC388.2@113.75,241.7 113.55,241.7 113,242.25 113,245.389 108.239,250.15 103.85,250.15 102.8,251.2 102.8,251.999 ; 102.8,251.999 102.8,252.249
INVB_S1: pad.ICT@62.5,243.25 RC297.1 UC603.2 UC607.11 UC610.11 | length 101.9
  Top Layer w0.25: v1(61.77,241.54) UC603.2@63.4,241.54 65.21,241.54 66.1,240.65 66.1,233.877 68.077,231.9 81.054,231.9 82.204,230.75 90.273,230.75 91.023,230 v1@92,230 ; v1@61.964,241.346 cw(c62.434,240.876) 62.434,241.54 cw(c62.434,242.204) v1@61.964,241.734 ; UC603.2@62.476,241.416 ccw(c62.178,241.118) 62.178,241.54 ccw(c62.178,241.962) UC603.2@62.476,241.664 ; UC603.2@64.324,241.416 cw(c64.622,241.118) 64.622,241.54 cw(c64.622,241.962) UC603.2@64.324,241.664 ; v1@92.056,229.806 ccw(c91.586,229.336) 91.586,230 ccw(c91.586,230.664) v1@92.056,230.194 ; v1@98.975,238.492 cw(c98.377,238.473) 98.8,238.05 cw(c99.223,237.627) v1@99.242,238.225 ; v1@99.25,238.775 ccw(c99.25,239.439) 99.719,238.969 ccw(c100.189,238.5) v1@99.525,238.5 ; UC607.11@100.176,238.876 ccw(c99.878,238.578) 99.878,239 ccw(c99.878,239.422) UC607.11@100.176,239.124 ; UC607.11@101.1,239 99.75,239 98.8,238.05 98.8,233.414 99.564,232.65 114.259,232.65 115.6,231.309 115.6,225.15 116,224.75 UC610.11@117.6,224.75 ; UC610.11@116.676,224.626 ccw(c116.378,224.328) 116.378,224.75 ccw(c116.378,225.172) UC610.11@116.676,224.874
  Bottom Layer w0.25: v1(61.77,241.54) RC297.1@63.11,241.54 ; v1@61.964,241.346 cw(c62.434,240.876) 62.434,241.54 cw(c62.434,242.204) v1@61.964,241.734 ; pad.ICT@62.199,242.949 cw(c61.474,242.224) 62.5,242.224 cw(c63.526,242.224) pad.ICT@62.801,242.949 ; 62.341,241.54 ccw(c62.341,242.359) RC297.1@62.92,241.78 ; 62.39,241.54 cw(c62.39,240.79) RC297.1@62.92,241.32 ; 62.5,241.54 pad.ICT@62.5,243.25 ; v1(92.25,230) 93.45,230 94.45,231 94.45,233.814 94.9,234.264 94.9,236.25 95.65,237 98.5,237 99.25,237.75 v1(99.25,238.5) ; v1@92.444,229.806 cw(c92.914,229.336) 92.914,230 cw(c92.914,230.664) v1@92.444,230.194 ; v1@99.056,238.306 cw(c98.586,237.836) 99.25,237.836 cw(c99.914,237.836) v1@99.444,238.306
INVB_S2: pad.ICT@110.25,219 RC323.1 UC604.6 UC611.8 | length 67.3
  Top Layer w0.5: RC323.1@76.459,221.809 cw(c76.117,221.467) 76.6,221.467 cw(c77.083,221.467) RC323.1@76.741,221.809 ; v1(76.6,220.75) RC323.1@76.6,221.71 ; RC323.1@76.741,221.909 cw(c77.469,221.181) 77.469,222.21 ; RC323.1@76.81,222.21 UC604.6@79.4,222.21 ; v1(129.04,220.94) UC611.8@130.85,220.94
  Bottom Layer w0.25: v1(76.6,220.75) 76.6,220.875 77.725,222 83.25,222 86.25,219 127.1,219 v1(129.04,220.94) ; v1@76.6,221.025 ccw(c76.6,221.386) 76.856,221.131 ; v1@76.875,220.75 cw(c77.841,220.75) 77.158,221.433 ; pad.ICT@109.949,218.699 ccw(c109.224,217.974) 109.224,219 ccw(c109.224,220.026) pad.ICT@109.949,219.301 ; pad.ICT@110.551,218.699 cw(c111.276,217.974) 111.276,219 cw(c111.276,220.026) pad.ICT@110.551,219.301 ; v1@128.765,220.94 cw(c128.101,220.94) 128.571,220.471 cw(c129.04,220.001) v1@129.04,220.665
INVB_S3: pad.ICT@86.5,221 RC331.1 UC604.4 UC611.5 | length 62.8
  Top Layer w0.5: v1(76.5,223.5) 76.5,224.69 RC331.1@76.6,224.79 ; 76.5,224.016 cw(c77.324,224.016) 76.741,224.599 cw(c77.107,224.233) 77.107,224.75 ; RC331.1@76.64,224.75 UC604.4@79.4,224.75 ; RC331.1@76.741,224.881 ccw(c77.059,225.199) 77.059,224.75 ; v1(123.84,223.48) UC611.5@125.65,223.48
  Bottom Layer w0.25: v1@76.5,223.48 v1@76.52,223.48 ; v1(76.5,223.5) v1@76.52,223.48 ; v1@76.694,223.306 cw(c77.116,222.884) 77.116,223.48 ; v1@76.694,223.694 ccw(c77.212,224.212) 77.212,223.48 ; 85.598,222.152 cw(c84.445,221) pad.ICT@86.075,221 ; 86.024,221.726 cw(c85.299,221) pad.ICT@86.325,221 ; 86.201,221.549 ccw(c86.5,221.847) pad.ICT@86.5,221.425 ; pad.ICT@86.801,220.699 cw(c87.526,219.974) 87.526,221 cw(c87.526,222.026) pad.ICT@86.801,221.301 ; v1@123.565,223.48 cw(c122.901,223.48) 123.371,223.011 cw(c123.84,222.541) v1@123.84,223.205 ; v1(123.84,223.48) 121.36,221 86.75,221 84.27,223.48 v1@76.52,223.48
INVB_S4: pad.ICT@69.5,241.25 RC300.1 UC603.12 UC607.5 UC610.9 | length 97
  Top Layer w0.25: UC603.12@67.676,240.146 ccw(c67.378,239.848) 67.378,240.27 ccw(c67.378,240.692) UC603.12@67.676,240.394 ; UC603.12@69.4,240.095 cw(c69.4,238.876) v1@70.262,239.738 ; UC603.12@69.4,240.345 cw(c69.4,239.729) 69.835,240.165 ; UC603.12@69.506,240.131 cw(c69.686,239.896) 69.895,240.105 ; UC603.12@69.545,240.172 cw(c69.73,240.046) 69.73,240.27 ; UC603.12@69.545,240.368 ccw(c69.73,240.494) 69.73,240.27 ; v1@69.975,239.75 ccw(c69.311,239.75) 69.781,240.219 ccw(c70.25,240.689) v1@70.25,240.025 ; v1(70.25,239.75) 69.73,240.27 ; v1@91.225,230.758 ccw(c90.627,230.777) 91.05,231.2 ; v1@91.492,231.025 cw(c91.473,231.623) 91.05,231.2 ; v1(91.5,230.75) 91.05,231.2 ; v1(94.25,237) 94.98,237.73 UC607.5@95.9,237.73 97.62,237.73 98.35,237 98.35,233.227 99.377,232.2 114.073,232.2 115.15,231.123 115.15,223.85 116.79,222.21 UC610.9@117.6,222.21 ; v1@94.25,237.275 ccw(c94.25,237.939) 94.719,237.469 ccw(c95.189,237) v1@94.525,237 ; 94.596,237.346 cw(c95.1,236.843) UC607.5@95.1,237.555 ; UC607.5@96.824,237.606 cw(c97.122,237.308) 97.122,237.73 cw(c97.122,238.152) UC607.5@96.824,237.854 ; 116.484,222.516 ccw(c116.8,222.832) UC610.9@116.8,222.385 ; 116.508,222.492 cw(c116.227,222.21) UC610.9@116.625,222.21 ; 69.73,240.27 UC603.12@68.6,240.27 67.27,240.27 66.55,239.55 66.55,234.064 68.264,232.35 81.241,232.35 82.391,231.2 91.05,231.2
  Bottom Layer w0.25: RC300.1@68.85,239.75 v1(70.25,239.75) ; RC300.1@69.08,239.52 cw(c69.635,238.965) 69.635,239.75 cw(c69.635,240.535) RC300.1@69.08,239.98 ; pad.ICT@69.199,240.949 cw(c68.474,240.224) 69.5,240.224 cw(c70.526,240.224) pad.ICT@69.801,240.949 ; 69.5,239.75 pad.ICT@69.5,241.25 ; v1@70.056,239.556 ccw(c69.586,239.086) 69.586,239.75 ccw(c69.586,240.414) v1@70.056,239.944 ; v1(91.5,230.75) 93.5,230.75 94,231.25 94,234 94.45,234.45 94.45,236.8 v1(94.25,237) ; v1@91.694,230.556 cw(c92.164,230.086) 92.164,230.75 cw(c92.164,231.414) v1@91.694,230.944
INVB_SS2: pad.ICT@130.75,223.5 UC607.7 UC611.10 | length 58.5
  Top Layer w0.25: UC607.7@95.9,235.19 97.46,235.19 97.9,234.75 97.9,233.041 99.191,231.75 113.886,231.75 114.7,230.936 114.7,220.3 116,219 127.5,219 128,219.5 128,222.44 v1(129.04,223.48) ; UC607.7@96.824,235.066 cw(c97.122,234.768) 97.122,235.19 cw(c97.122,235.612) UC607.7@96.824,235.314 ; v1@128.765,223.48 cw(c128.101,223.48) 128.571,223.011 cw(c129.04,222.541) v1@129.04,223.205
  Top Layer w0.5: v1(129.04,223.48) UC611.10@130.85,223.48
  Bottom Layer w0.25: v1(129.04,223.48) pad.ICT@130.73,223.48 ; v1@129.234,223.286 cw(c129.704,222.816) 129.704,223.48 cw(c129.704,224.144) v1@129.234,223.674 ; 129.676,223.48 ccw(c129.676,224.574) pad.ICT@130.449,223.801 ; 129.772,223.48 cw(c129.772,222.522) pad.ICT@130.449,223.199
INVB_SS3: pad.ICT@120.75,223.9 UC607.9 UC611.4 | length 47
  Top Layer w0.25: UC607.9@100.176,236.336 ccw(c99.878,236.038) 99.878,236.46 ccw(c99.878,236.882) UC607.9@100.176,236.584 ; UC607.9@101.1,236.46 99.71,236.46 99.25,236 99.25,233.6 99.75,233.1 114.446,233.1 118.046,229.5 122.75,229.5 123,229.25 123,225.5 123.75,224.75 UC611.4@125.65,224.75 ; v1@123.225,225 ccw(c122.561,225) 123.031,225.469 ccw(c123.5,225.939) v1@123.5,225.275 ; v1@123.518,225.018 ccw(c124.164,225.664) 124.164,224.75 ; v1@123.694,225.194 ccw(c124.767,226.267) UC611.4@124.767,224.75 ; UC611.4@124.726,224.626 ccw(c124.428,224.328) 124.428,224.75 ccw(c124.428,225.172) UC611.4@124.726,224.874
  Bottom Layer w0.25: pad.ICT@120.6,223.9 122.4,223.9 v1(123.5,225) ; pad.ICT@121.051,223.599 cw(c121.776,222.874) 121.776,223.9 cw(c121.776,224.926) pad.ICT@121.051,224.201 ; v1@123.225,225 cw(c122.561,225) 123.031,224.531 cw(c123.5,224.061) v1@123.5,224.725
INVBQ1_A: CND7.21 QC7.2 QC11.2 | length 40.4
  Bottom Layer w0.25: CND7.21@89.23,255.32 cw(c89.23,253.63) 90.425,254.825 cw(c91.62,256.02) CND7.21@89.93,256.02 ; CND7.21@89.23,255.57 cw(c89.23,254.484) 89.998,255.252 cw(c90.766,256.02) CND7.21@89.68,256.02 ; CND7.21@89.23,256.02 90.5,254.75 90.5,251.273 95.45,246.323 95.45,240.692 96.642,239.5 99.5,239.5 100.5,238.5 100.5,236.095 QC11.2@101.5,235.095 101.345,235.095 100.5,234.25 100.5,232.845 QC7.2@101.5,231.845 ; 100.668,234.418 cw(c101.5,233.587) QC11.2@101.5,234.763 ; 101.042,234.792 ccw(c100.74,235.095) 101.168,235.095 ccw(c100.366,235.095) 100.933,235.662 ccw(c101.5,236.229) QC11.2@101.5,235.427 ; QC11.2@101.095,234.845 cw(c101.5,234.44) QC11.2@101.5,235.013 ; QC7.2@101.168,231.845 ccw(c100.366,231.845) 100.933,232.412 ccw(c101.5,232.979) QC7.2@101.5,232.177
INVBQ1_K: CND7.22 RC355.2 | length 21.3
  Bottom Layer w0.25: CND7.22@89.23,253.019 90,252.249 ; CND7.22@89.23,253.269 90,252.499 ; CND7.22@89.23,253.378 CND7.22@89.23,253.48 90,252.71 90,252.499 ; RC355.2@96.8,238.2 RC355.2@97,238.2 ; RC355.2@97.5,238.2 97.3,238.2 97.275,238.225 95,240.5 95,246.136 90,251.136 90,252.249 ; 90,252.249 90,252.499
INVBQ2_A: CND7.23 QC15.2 QC19.2 | length 27.5
  Bottom Layer w0.25: CND7.23@86.69,255.32 cw(c86.69,253.63) 87.885,254.825 cw(c89.08,256.02) CND7.23@87.39,256.02 ; CND7.23@86.69,255.57 cw(c86.69,254.484) 87.458,255.252 cw(c88.226,256.02) CND7.23@87.14,256.02 ; CND7.23@86.69,256.02 88,254.71 88,249.523 92,245.523 92,244.845 QC15.2@93,243.845 92.845,243.845 92,243 92,241.595 QC19.2@93,240.595 ; 92.168,243.168 cw(c93,242.337) QC15.2@93,243.513 ; 92.542,243.542 ccw(c92.24,243.845) 92.668,243.845 ccw(c91.866,243.845) 92.433,244.412 ccw(c93,244.979) QC15.2@93,244.177 ; QC15.2@92.595,243.595 cw(c93,243.19) QC15.2@93,243.763 ; QC19.2@92.668,240.595 ccw(c91.866,240.595) 92.433,241.162 ccw(c93,241.729) QC19.2@93,240.927
INVBQ2_K: CND7.24 RC367.2 | length 15.5
  Bottom Layer w0.25: CND7.24@86.69,253.109 87.55,252.249 ; CND7.24@86.69,253.31 87.55,252.45 87.55,252.249 ; CND7.24@86.69,253.424 CND7.24@86.69,253.48 87.55,252.62 87.55,252.249 ; RC367.2@88.629,245.071 ccw(c87.733,245.967) 89,245.967 ccw(c90.267,245.967) RC367.2@89.371,245.071 ; RC367.2@88.806,244.894 ccw(c88.336,245.364) 89,245.364 ccw(c89.664,245.364) RC367.2@89.194,244.894 ; RC367.2@89,244.7 89,247.886 87.55,249.336 87.55,252.249